# Altium PCB MCU.PcbDoc
Units mm, origin at the board's own origin, x right, y up, seen from the top; angles counter-clockwise.
Board outline 135.51 x 52.96 mm, 2 copper layers (Top Layer, Bottom Layer); 50 components, 42 nets, 211 pads, 1 vias.
Unrouted connection lines stored in the file: 121.
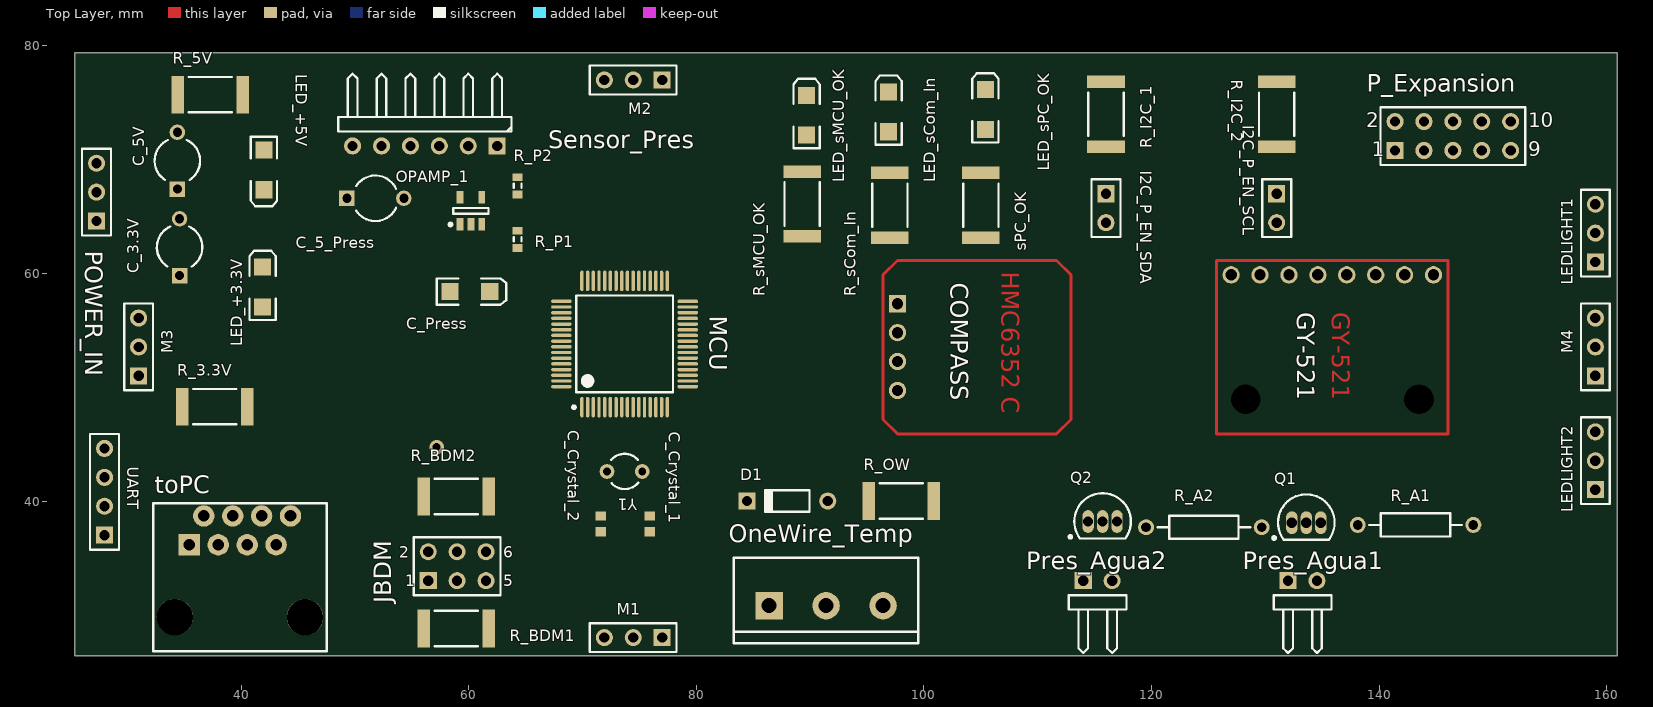
[diagram p0: Top Layer view]
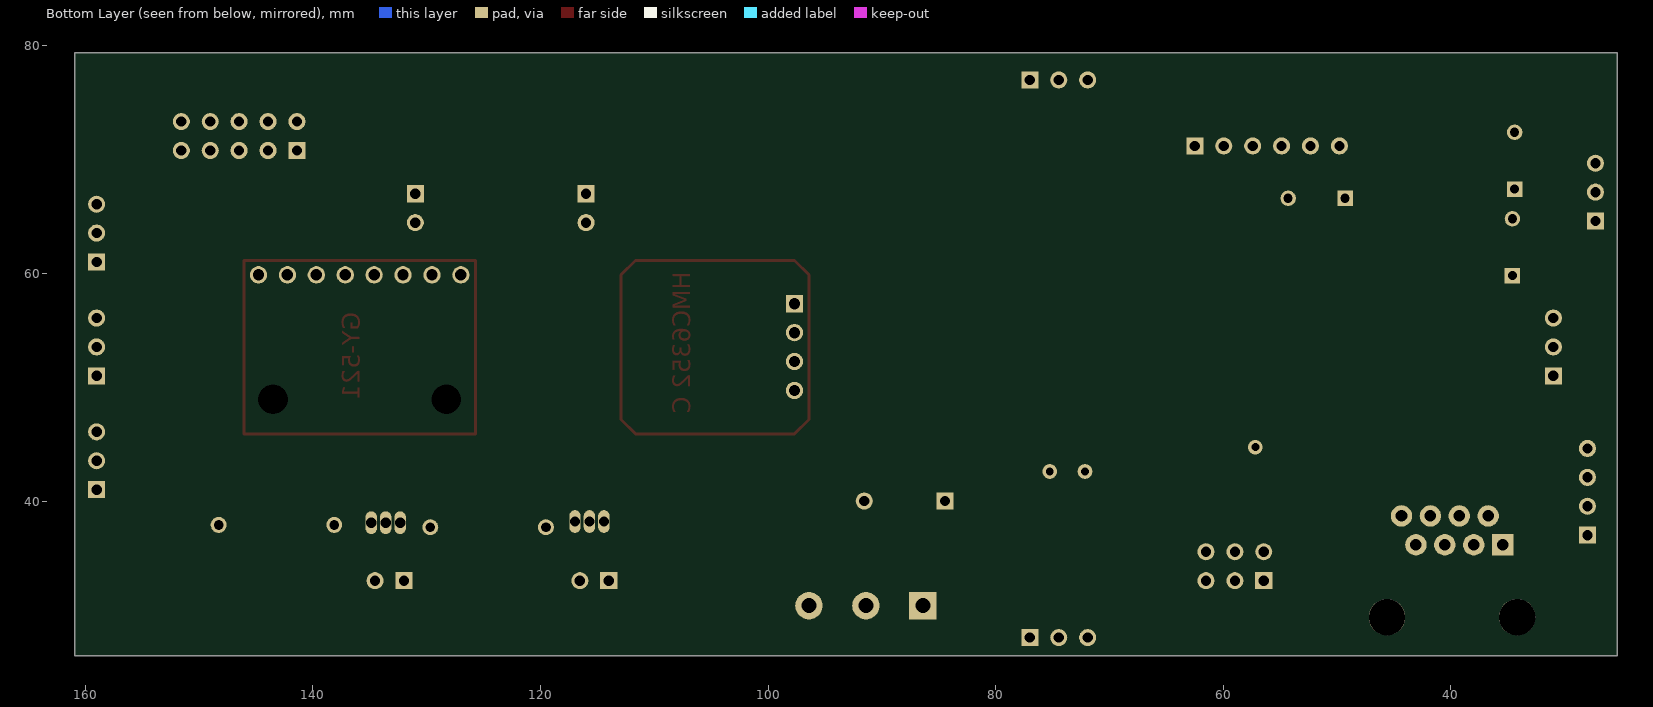
[diagram p1: Bottom Layer view, seen from below]

## Layer stack, top to bottom
Top Solder: solder mask 0.0102, Solder Resist, Dk 3.5
Top Layer: signal copper 0.0356
Dielectric 1: dielectric 0.32, FR-4, Dk 4.8
Bottom Layer: signal copper 0.0356
Bottom Solder: solder mask 0.0102, Solder Resist, Dk 3.5

## Board outline
25.4,79.375 25.4,26.416 160.909,26.416 160.909,79.375

## Design rules (kind name [scope] priority, off if disabled: settings)
Clearance [All] p1: gap=0.254
PolygonConnect [All] p1: connectstyle=Relief reliefconductorwidth=0.254 reliefentries=4 polygonreliefangle="90 Angle" airgapwidth=0.254
RoutingVias [All] p1: holewidth=0.711 width=1.27 viastyle="Through Hole" minholewidth=0.711 minwidth=1.27 maxholewidth=0.711 maxwidth=1.27
SolderMaskExpansion [All] p1: expansion=0.102
Width [All] p1: maxlimit=0.254 minlimit=0.254 preferedwidth=0.254
30 further rules are at their usual default settings.

## Classes and differential pairs
component class PWM_OUTS: LEDLIGHT1 LEDLIGHT2 M1 M2 M3 M4
component class Presencia_Agua: Pres_Agua1 Pres_Agua2 Q1 Q2 R_A1 R_A2
component class MCU: C_Crystal_1 C_Crystal_2 COMPASS D1 GY-521 I2C_P_EN_SCL I2C_P_EN_SDA JBDM LED_+3.3V LED_+5V LED_sCom_In LED_sMCU_OK LED_sPC_OK MCU OneWire_Temp R_3.3V R_5V R_BDM1 R_BDM2 R_I2C_1 R_I2C_2 R_OW R_sCom_In R_sMCU_OK sPC_OK toPC UART Y1
component class Fuente: C_3.3V C_5V POWER_IN
component class "Expansion Board": P_Expansion
component class ADC_PRES: C_5_Press C_Press OPAMP_1 R_P1 R_P2 Sensor_Pres

## Components (designator, comment, footprint, x,y, rotation, side; value= is the part's Value field where it differs from the comment)
C_3.3V "Cap Pol1" CAPR5-4X5 34.6,62.3 r90 top
C_5_Press "Cap Pol1" CAPR5-4X5 51.8,66.6 r0 top
C_5V "Cap Pol1" CAPR5-4X5 34.4,69.9 r90 top
C_Crystal_1 "Cap Semi" 1608[0603] 75.9,38 r270 top
C_Crystal_2 "Cap Semi" 1608[0603] 71.6,38 r270 top
C_Press "Cap" 3.2X1.6X1.1 60.1,58.4 r0 top
COMPASS "HMC6352" HMC6352_SF 96.16,61.4 r270 top
D1 "Diode 1N4148" DO-35 88,40 r180 top
GY-521 "MPU-6050 Board GY-521" GY-521 123.186,59.876 r270 top
I2C_P_EN_SCL "Jumper_STANDARD" HDR1X2 131,67 r270 top
I2C_P_EN_SDA "Jumper_STANDARD" HDR1X2 116,67 r270 top
JBDM "Header 3X2" HDR2X3 56.445,33 r0 top
LED_+3.3V "LED" 3.2X1.6X1.1 41.9,58.8 r90 top
LED_+5V "LED" 3.2X1.6X1.1 42,69.1 r270 top
LED_sCom_In "LED" 3.2X1.6X1.1 96.9,74.2 r90 top
LED_sMCU_OK "LED" 3.2X1.6X1.1 89.7,73.9 r90 top
LED_sPC_OK "LED" 3.2X1.6X1.1 105.4,74.4 r90 top
LEDLIGHT1 "PWMServoTypeOut" HDR1X3 159,61 r90 top
LEDLIGHT2 "PWMServoTypeOut" HDR1X3 159,41 r90 top
M1 "PWMServoTypeOut" HDR1X3 77,28 r180 top
M2 "PWMServoTypeOut" HDR1X3 77,77 r180 top
M3 "PWMServoTypeOut" HDR1X3 31,51 r90 top
M4 "PWMServoTypeOut" HDR1X3 159,51 r90 top
MCU "MCF51QE128CLH" 840F-02_N 73.7,53.8 r90 top
OneWire_Temp "" SCREWTERMINAL-5MM-3 86.4,30.8 r0 top
OPAMP_1 "OPA345NA/250" TI-DBV5_N 60.2,65.5 r90 top
P_Expansion "Header 5X2" HDR2X5 141.4,70.8 r0 top
POWER_IN "Header 3" HDR1X3 27.3,64.6 r90 top
Pres_Agua1 "Jumper_STANDAR" HDR1X2H 132,33 r0 top
Pres_Agua2 "Jumper_STANDAR" HDR1X2H 114,33 r0 top
Q1 "PNP" TO-92A 133.6,38.1 r270 top
Q2 "PNP" TO-92A 115.7,38.2 r270 top
R_3.3V "Res" RESC6332 37.7,48.3 r180 top
R_5V "Res" RESC6332 37.3,75.7 r180 top
R_A1 "Res2" AXIAL-0.4 143.2,37.9 r0 top
R_A2 "Res2" AXIAL-0.4 124.6,37.7 r0 top
R_BDM1 "Res" RESC6332 58.9,28.8 r0 top
R_BDM2 "Res" RESC6332 58.9,40.4 r180 top
R_I2C_1 "Res3" RESC6332 116,74 r90 top
R_I2C_2 "Res3" RESC6332 131,74 r90 top
R_OW "Res" RESC6332 98,40 r180 top
R_P1 "Res3" J1-0603 64.3,63 r270 top
R_P2 "Res3" J1-0603 64.3,67.7 r270 top
R_sCom_In "Res" RESC6332 97,66 r270 top
R_sMCU_OK "Res" RESC6332 89.3,66.1 r270 top
Sensor_Pres "MPX5700AP" HDR1X6H 62.5,71.2 r180 top (schematic designator *)
sPC_OK "Res" RESC6332 105,66 r90 top
toPC "PRT-00643; BOB-00716." RJ45-8 39.9,29.8 r0 top
UART "Header 4" HDR1X4 28,37 r90 top
Y1 "32.768KHz" R38 73.7,42.6 r90 top

## Footprints (in the part's own frame and the unit in brackets; to place one, negate y for a bottom-side part, rotate by r counter-clockwise, add the part's x,y. Pads: shape width x height; smd on the part's side, far side on the other; paste and mask are expansions set on the pad)
3.2X1.6X1.1 [mm] "SMT LED; 2 Flat Leads"
  rect 1.5x1.5 smd: 1(-1.75,0) 2(1.75,0)
  silkscreen extent -2.9,-1.15 3.2,1.15
840F-02_N [mm] "Thin QFP, 64-Leads, Body 10x10mm, Pitch 0.5mm, IPC Medium Density"
  oval 1.8x0.3 smd: 1(-5.55,3.75) 2(-5.55,3.25) 3(-5.55,2.75) 4(-5.55,2.25) 5(-5.55,1.75) 6(-5.55,1.25) 7(-5.55,0.75) 8(-5.55,0.25) 9(-5.55,-0.25) 10(-5.55,-0.75) 11(-5.55,-1.25) 12(-5.55,-1.75) 13(-5.55,-2.25) 14(-5.55,-2.75) 15(-5.55,-3.25) 16(-5.55,-3.75) 33(5.55,-3.75) 34(5.55,-3.25) 35(5.55,-2.75) 36(5.55,-2.25) 37(5.55,-1.75) 38(5.55,-1.25) 39(5.55,-0.75) 40(5.55,-0.25) 41(5.55,0.25) 42(5.55,0.75) 43(5.55,1.25) 44(5.55,1.75) 45(5.55,2.25) 46(5.55,2.75) 47(5.55,3.25) 48(5.55,3.75)
  oval 0.3x1.8 smd: 17(-3.75,-5.55) 18(-3.25,-5.55) 19(-2.75,-5.55) 20(-2.25,-5.55) 21(-1.75,-5.55) 22(-1.25,-5.55) 23(-0.75,-5.55) 24(-0.25,-5.55) 25(0.25,-5.55) 26(0.75,-5.55) 27(1.25,-5.55) 28(1.75,-5.55) 29(2.25,-5.55) 30(2.75,-5.55) 31(3.25,-5.55) 32(3.75,-5.55) 49(3.75,5.55) 50(3.25,5.55) 51(2.75,5.55) 52(2.25,5.55) 53(1.75,5.55) 54(1.25,5.55) 55(0.75,5.55) 56(0.25,5.55) 57(-0.25,5.55) 58(-0.75,5.55) 59(-1.25,5.55) 60(-1.75,5.55) 61(-2.25,5.55) 62(-2.75,5.55) 63(-3.25,5.55) 64(-3.75,5.55)
  silkscreen extent -5.67,-4.25 4.25,4.57, body extent -5,-5 5,5, height 1.6
1608[0603] [mm] "Chip Capacitor, Body 1.6x0.8mm, IPC High Density"
  rect 0.8x0.9 smd: 1(-0.7,0) 2(0.7,0)
  body extent -0.87,-0.48 0.87,0.48, height 1.3
AXIAL-0.4 [mm] "Axial Device, Thru-Hole; 2 Leads; 0.4 in Pin Spacing"
  round 1.4 hole 0.85: 1(-5.08,0) 2(5.08,0)
  silkscreen extent -4.06,-1.02 4.06,1.02
CAPR5-4X5 [mm] "Capacitor; 2 Leads"
  rect 1.35x1.35 hole 0.8: 1(-2.5,0)
  round 1.35 hole 0.8: 2(2.5,0)
  silkscreen extent -1.69,-2 1.82,2
DO-35 [mm] "Diode, Axial; Body 3.8 x 1.9 mm (LxDia. max), Lead Dia. 0.53 mm (max)"
  round 1.5 hole 0.9: 1(-3.55,0)
  rect 1.5x1.5 hole 0.9: 2(3.55,0)
  silkscreen extent -1.95,-0.95 2.05,0.95
GY-521 [mil]
  round 60 hole 39.37: 1(0,850) 2(0,750) 3(0,650) 4(0,550) 5(0,450) 6(0,350) 7(0,250) 8(0,150)
  round 60 hole 102.36: SCREW1(430,800) SCREW2(430,200)
  Top Layer lines w10: 550,100 -50,100 -50,900 550,900 550,100
HDR1X2 [mm] "Connector; Header; 2 Position"
  rect 1.5x1.5 hole 0.9: 1(0,0)
  round 1.5 hole 0.9: 2(2.54,0)
  silkscreen extent -1.27,-1.27 3.81,1.27
HDR1X2H [mm] "Connector; Header; 2 Position; Right Angle"
  rect 1.5x1.5 hole 0.9: 1(0,0)
  round 1.5 hole 0.9: 2(2.54,0)
  silkscreen extent -1.27,-6.35 3.81,-1.27
HDR1X3 [mm] "Connector; Header; 3 Position"
  rect 1.5x1.5 hole 0.9: 1(0,0)
  round 1.5 hole 0.9: 2(2.54,0) 3(5.08,0)
  silkscreen extent -1.27,-1.27 6.35,1.27
HDR1X4 [mm] "Connector; Header; 4 Position"
  rect 1.5x1.5 hole 0.9: 1(0,0)
  round 1.5 hole 0.9: 2(2.54,0) 3(5.08,0) 4(7.62,0)
  silkscreen extent -1.27,-1.27 8.89,1.27
HDR1X6H [mm] "Connector; Header; 6 Position; Right Angle"
  rect 1.5x1.5 hole 0.9: 1(0,0)
  round 1.5 hole 0.9: 2(2.54,0) 3(5.08,0) 4(7.62,0) 5(10.16,0) 6(12.7,0)
  silkscreen extent -1.27,-6.35 13.97,-1.27
HDR2X3 [mm] "Connector; Header; 3x2 Position"
  rect 1.5x1.5 hole 0.9: 1(0,0)
  round 1.5 hole 0.9: 2(0,2.54) 3(2.54,0) 4(2.54,2.54) 5(5.08,0) 6(5.08,2.54)
  silkscreen extent -1.27,-1.27 6.35,3.81
HDR2X5 [mm] "Connector; Header; 5x2 Position"
  rect 1.5x1.5 hole 0.9: 1(0,0)
  round 1.5 hole 0.9: 2(0,2.54) 3(2.54,0) 4(2.54,2.54) 5(5.08,0) 6(5.08,2.54) 7(7.62,0) 8(7.62,2.54) 9(10.16,0) 10(10.16,2.54)
  silkscreen extent -1.27,-1.27 11.43,3.81
HMC6352_SF [mil]
  rect 60x60 hole 39.37: 1(160,60)
  round 60 hole 39.37: 2(260,60) 3(360,60) 4(460,60)
  Top Layer lines w10: 560,10 410,10 60,10 10,60 10,410 10,610 60,660 560,660 610,610 610,310 610,60 560,10
J1-0603 [mm] "Chip Resistor, Body 1.6x0.8mm, IPC High Density"
  rect 0.7x0.9 smd: 1(-0.75,0) 2(0.75,0)
  silkscreen extent -0.2,-0.35 0.2,0.35, body extent -0.85,-0.48 0.85,0.48, height 0.9
R38 [mm] "Crystal, Thru-Hole; 2 Leads; Body 3.1 x 8.2 mm (Dia.xH)"
  round 1.3 hole 0.7: 1(0,1.55) 2(0,-1.55)
  silkscreen extent -1.55,-1.19 1.55,1.17
RESC6332 [mm] "Chip Resistor, Body 6.3x3.2mm, IPC High Density"
  rect 1.1x3.3 smd: 1(-2.85,0) 2(2.85,0)
  silkscreen extent -1.9,-1.55 1.9,1.55, body extent -3.22,-1.68 3.22,1.68, height 0.9
RJ45-8 [mil]
  round 126 hole 126: 1(-225,0) 1(225,0)
  rect 74x74 hole 40: 1(-175,250)
  round 74 hole 40: 2(-125,350) 3(-75,250) 4(-25,350) 5(25,250) 6(75,350) 7(125,250) 8(175,350)
  silkscreen extent -300,-118 300,394
SCREWTERMINAL-5MM-3 [mil]
  rect 95x95 hole 52: 1(0,0)
  round 95 hole 52: 2(197,0) 3(394,0)
  silkscreen extent -122,-130 516,166
TI-DBV5_N [mm] "SOT23, 5-Leads, Body 2.9x1.6mm, Pitch 0.95mm, IPC Medium Density"
  rect 1.1x0.6 smd: 1(-1.2,0.95) 2(-1.2,0) 3(-1.2,-0.95) 4(1.2,-0.95) 5(1.2,0.95)
  silkscreen extent -1.32,-1.55 0.25,1.92, body extent -0.87,-1.52 0.87,1.53, height 1.45
TO-92A [mm] "TO, Flat Index; 3 In-Line, Axial Leads; Body Dia. 4.5mm; Leads 0.51 x 0.48 mm (max)"
  oval 2x1 hole 0.9: 1(0,-1.27) 2(0,0) 3(0,1.27)
  silkscreen extent -2.48,-2.95 1.5,2.48, body extent -2.5,-2.5 1.5,2.5, height 6.86

## Part data
C_3.3V C_5_Press C_5V: "Polarized Capacitor (Radial)"
C_Crystal_1 C_Crystal_2: "Capacitor (Semiconductor SIM Model)"
C_Press: "Capacitor"
D1: "High Conductance Fast Diode"
GY-521: library part GY-521
I2C_P_EN_SCL I2C_P_EN_SDA: library part Jumper_STANDAR
JBDM: "Header, 3-Pin, Dual row"
LED_+3.3V LED_+5V LED_sCom_In LED_sMCU_OK LED_sPC_OK: library part LED2, "Typical RED, GREEN, YELLOW, AMBER GaAs LED"
MCU: "MCF51QE128 ColdFire V1 Microcontroller, 32-Bit, 128KB Flash, 8KB RAM, -40°C to 85°C, 64-Pin LQFP"
OneWire_Temp: library part M03-SCREW-5MM
OPAMP_1: "Low Power, Single-Supply, Rail-to-Rail Operational Amplifier MicroAmplifier(TM) Series, 2.7 to 5.5 V, -55 to 125 degC, 5-pin SOT23 (DBV5), Green (RoHS & no Sb/Br)"
P_Expansion: "Header, 5-Pin, Dual row"
POWER_IN: "Header, 3-Pin"
Q1 Q2: "PNP Bipolar Transistor"
R_3.3V R_5V R_BDM1 R_BDM2 R_OW R_sCom_In R_sMCU_OK sPC_OK: library part Res3, "Resistor"
R_A1 R_A2 R_I2C_1 R_I2C_2 R_P1 R_P2: "Resistor"
toPC: library part RJ45-8PTH
UART: "Header, 4-Pin"
Y1: library part XTAL, "Crystal Oscillator"

## Via types
v1: diameter 1.27, hole 0.711, Top Layer to Bottom Layer, 1 vias

## Nets (pads, with @x,y where several pads share a name; then routed paths per layer and width w, separated by ;. In a path a pad name is that pad's centre, name@x,y a point inside that pad or via, vN(x,y) a via of type N, cw(c..) or ccw(c..) an arc to the next point about the centre after c; other vN are vias at no path point)
+3.3V: C_3.3V.1 COMPASS.3 GY-521.1 JBDM.6 OneWire_Temp.3 OPAMP_1.5 P_Expansion.7 POWER_IN.1 R_3.3V.2 R_A1.2 R_A2.2 R_BDM1.2 R_BDM2.1 R_I2C_1.2 R_I2C_2.2 R_OW.2 UART.2
+5V: C_5_Press.1 C_5V.1 LEDLIGHT1.2 LEDLIGHT2.2 M1.2 M2.2 M3.2 M4.2 P_Expansion.5 POWER_IN.3 R_5V.2 toPC.4 toPC.5
AD1: MCU.42 P_Expansion.2
AD2: MCU.36 P_Expansion.4
AD3: MCU.35 P_Expansion.6
AD4: MCU.30 P_Expansion.8
ADC_PRESSURE_3.3V: MCU.43 OPAMP_1.1 OPAMP_1.4
BKGD: JBDM.1 MCU.64 R_BDM1.1
GND: C_3.3V.2 C_5_Press.2 C_5V.2 C_Crystal_1.1 C_Crystal_2.1 C_Press.1 COMPASS.4 GY-521.2 JBDM.2 LED_+3.3V.2 LED_+5V.2 LED_sCom_In.2 LED_sMCU_OK.2 LED_sPC_OK.2 LEDLIGHT1.1 LEDLIGHT2.1 M1.1 M2.1 M3.1 M4.1 OneWire_Temp.1 OPAMP_1.2 P_Expansion.9 P_Expansion.10 POWER_IN.2 Pres_Agua1.1 Pres_Agua2.1 Q1.1 Q2.1 R_P2.1 toPC.7 toPC.8 UART.1
LEDLIGHT1: LEDLIGHT1.3 MCU.26
LEDLIGHT2: LEDLIGHT2.3 MCU.25
M1_ESC: M1.3 MCU.50
M2_ESC: M2.3 MCU.18
M3_ESC: M3.3 MCU.38
M4_ESC: M4.3 MCU.49
NetC_Crystal_1_2: C_Crystal_1.2 MCU.13 Y1.2
NetC_Crystal_2_2: C_Crystal_2.2 MCU.12 Y1.1
NetI2C_P_EN_SCL_1: I2C_P_EN_SCL.1 R_I2C_2.1
NetI2C_P_EN_SDA_1: I2C_P_EN_SDA.1 R_I2C_1.1
NetLED_+3.3V_1: LED_+3.3V.1 R_3.3V.1
NetLED_+5V_1: LED_+5V.1 R_5V.1
NetLED_sCom_In_1: LED_sCom_In.1 R_sCom_In.1
NetLED_sMCU_OK_1: LED_sMCU_OK.1 R_sMCU_OK.1
NetLED_sPC_OK_1: LED_sPC_OK.1 sPC_OK.1
NetOPAMP_1_3: OPAMP_1.3 R_P1.1 R_P2.2
NetPres_Agua1_2: Pres_Agua1.2 Q1.2
NetPres_Agua2_2: Pres_Agua2.2 Q2.2
P_OUT: C_Press.2 R_P1.2
PRESENCIAAGUA1: MCU.58 Q1.3 R_A1.1
PRESENCIAAGUA2: MCU.57 Q2.3 R_A2.1
RESET: JBDM.4 MCU.63 R_BDM2.2
RXSERIALCOM: MCU.34 toPC.1 UART.3
RXSERIALCOM2: D1.1 MCU.52 OneWire_Temp.2 R_OW.1
S_PANCAMERA: MCU.19
S_TILTCAMERA: MCU.37
SCL: COMPASS.1 GY-521.3 I2C_P_EN_SCL.2 MCU.4 P_Expansion.3 toPC.6
SCOM_IN: MCU.16 R_sCom_In.2
SDA: COMPASS.2 GY-521.4 I2C_P_EN_SDA.2 MCU.3 P_Expansion.1 toPC.3
  other v1: 57.175,44.729
SMCU_OK: MCU.21 R_sMCU_OK.2
SPC_OK: MCU.62 sPC_OK.2
TXSERIALCOM: MCU.33 toPC.2 UART.4
TXSERIALCOM2: D1.2 MCU.51
pads on no net: GY-521.5 GY-521.6 GY-521.7 GY-521.8 GY-521.SCREW1 GY-521.SCREW2 JBDM.3 JBDM.5 MCU.1 MCU.2 MCU.5 MCU.6 MCU.7 MCU.8 MCU.9 MCU.10 MCU.11 MCU.14 MCU.15 MCU.17 MCU.20 MCU.22 MCU.23 MCU.24 MCU.27 MCU.28 MCU.29 MCU.31 MCU.32 MCU.39 MCU.40 MCU.41 MCU.44 MCU.45 MCU.46 MCU.47 MCU.48 MCU.53 MCU.54 MCU.55 MCU.56 MCU.59 MCU.60 MCU.61 Sensor_Pres.1 Sensor_Pres.2 Sensor_Pres.3 Sensor_Pres.4 Sensor_Pres.5 Sensor_Pres.6

## Dimensions
160.909,79.375 to 160.909,26.416 on Multi-Layer
160.909,79.375 to 25.4,79.375 on Multi-Layer

## Text inside footprints (layer, text, board x,y; h text height)
COMPASS: Top Layer "HMC6352 C" at 106.828,60.13 h1.52 r270
JBDM: Top Overlay "6" at 63.049,35.032 h1; Top Overlay "5" at 63.049,32.492 h1; Top Overlay "2" at 53.905,35.032 h1; Top Overlay "1" at 54.413,32.492 h1
OneWire_Temp: Mechanical 2 ">NAME" at 85.13,33.34 h1; Mechanical 4 ">VALUE" at 85.13,32.07 h1
P_Expansion: Top Overlay "10" at 153.084,72.832 h1.27; Top Overlay "9" at 153.084,70.292 h1.27; Top Overlay "1" at 139.368,70.292 h1.27; Top Overlay "2" at 138.86,72.832 h1.27